# EAGLE board 001 (EAGLE 9.6.2)
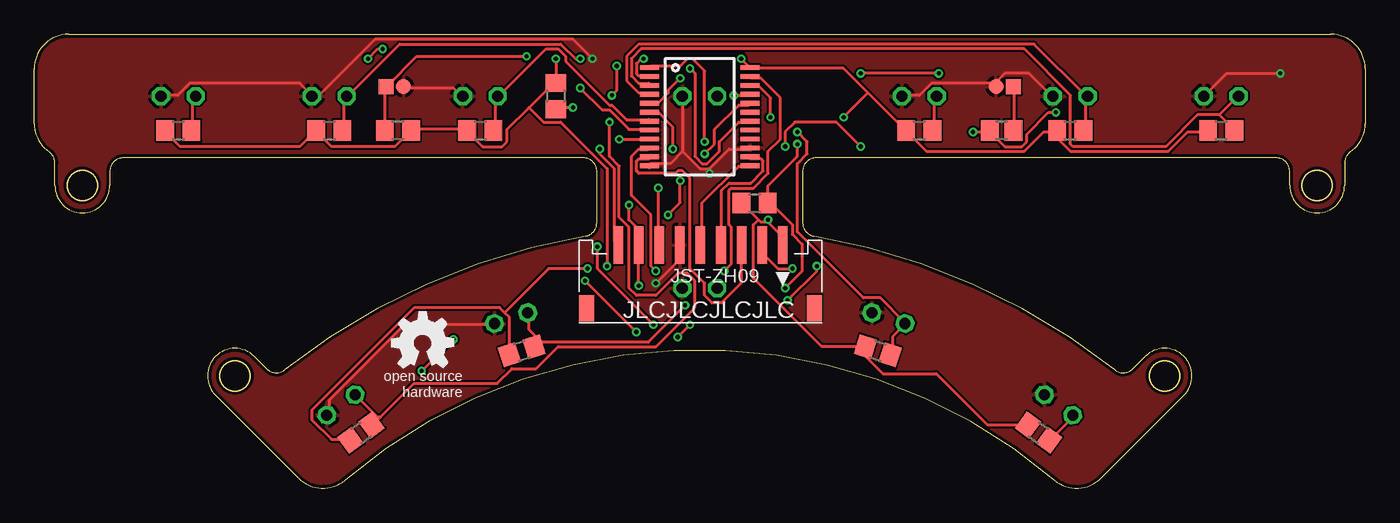
[diagram p0: board, top side]
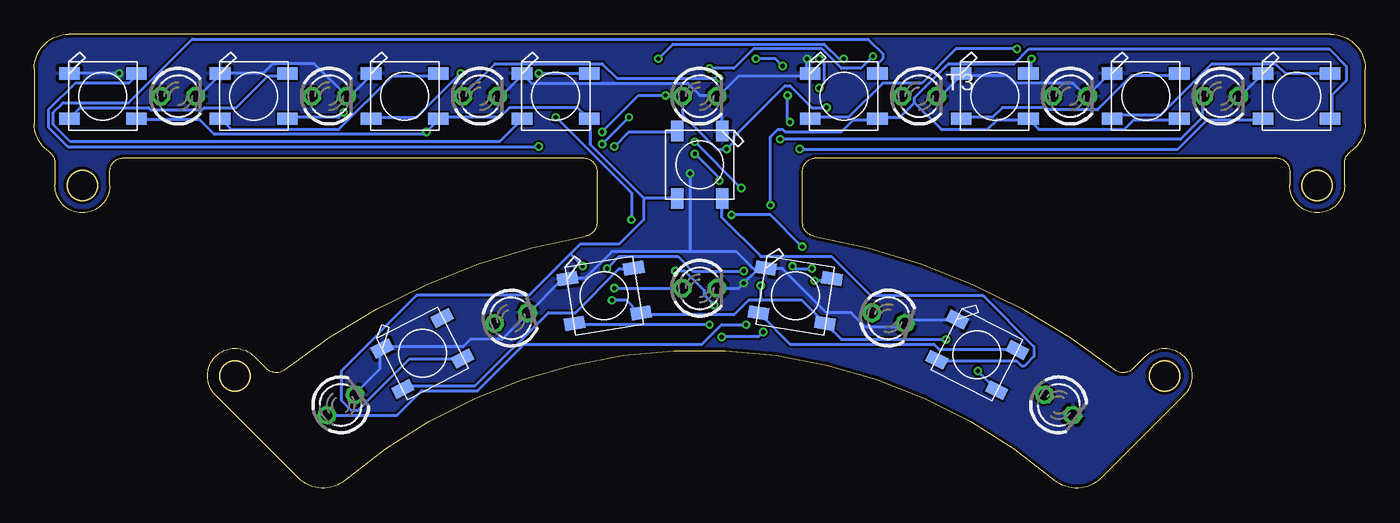
[diagram p1: board, bottom side, seen from below]

Size 97 x 33.07 mm. Coordinates in mm from the lower left corner, seen from the top.
Outline: 0,26.57 0,30.57 arc-90 2.5,33.07 94.5,33.07 arc-90 97,30.57 97,26.57 arc-55 95.93,24.52 arc55 95.5,23.7 95.5,22.07 arc-180 91.5,22.07 91.5,23.07 arc90 90.5,24.07 57,24.07 arc90 56,23.07 56,19.35 arc80 56.83,18.36 arc-28 78.74,8.63 arc83 80.06,8.71 80.97,9.61 arc-180 83.79,6.78 77.74,0.73 arc-85 74.36,0.59 arc81 22.64,0.59 arc-85 19.26,0.73 13.21,6.78 arc-180 16.03,9.61 16.94,8.71 arc83 18.26,8.63 arc-28 40.17,18.36 arc80 41,19.35 41,23.07 arc90 40,24.07 6.5,24.07 arc90 5.5,23.07 5.5,22.07 arc-180 1.5,22.07 1.5,23.7 arc55 1.07,24.52 arc-55 0,26.57
Outline: circle at 14.62,8.19 radius 1.1
Outline: circle at 82.38,8.19 radius 1.1
Outline: circle at 93.5,22.07 radius 1.1
Outline: circle at 3.5,22.07 radius 1.1
Copper layers (1*16): Top 0.035mm / dielectric 1.5mm / Bottom 0.035mm
Design rules "SeeedStudio_2layer_DRU_no_angle_20140221": minimum track width 6mil, minimum drill 12mil, track to track 6mil, track to pad 6mil, pad to pad 6mil, via to via 6mil, smd to smd 0mil, copper to edge 10mil, drill to drill 10mil, minimum pad ring 10mil, minimum via ring 6mil, stop-mask expansion 2mil, vias tented up to drill 100mil, thermal gap 10mil
Net classes: 0 default: width 0.203 mm

## Footprints (pad centres in the part's own frame; a part is rotated, then mirrored left to right if it is on the bottom)
WS2812B = smd 1.5 x 0.9: 1-VDD 2.45,-1.65; 2-DOUT 2.45,1.65; 3-GND -2.45,1.65; 4-DIN -2.45,-1.65
ZH-SM4-SIDE09 = smd 0.7 x 2.7: 1 -14.85,-5.65; 2 -13.35,-5.65; 3 -11.85,-5.65; 4 -10.35,-5.65; 5 -8.85,-5.65; 6 -7.35,-5.65; 7 -5.85,-5.65; 8 -4.35,-5.65; 9 -2.85,-5.65 | smd 1.1 x 1.9: P$1 -0.55,-1.05; P$2 -17.15,-1.05
R2012 = smd 1.3 x 1.5: 1 -0.85,0; 2 0.85,0
R0805 = smd 1.3 x 1.5: 1 -0.95,0; 2 0.95,0
MYPARTS_NJL7502L = drill 0.813 octagon: C -1.27,0; E 1.27,0
TP11R = smd 1.1 x 1.1: TP 0,0
TP11SQ = smd 1.1 x 1.1: TP 0,0
SPARKFUN_SSOP24 = smd 0.348 x 1.397: 1 -3.575,-3.656; 2 -2.925,-3.656; 3 -2.275,-3.656; 4 -1.625,-3.656; 5 -0.975,-3.656; 6 -0.325,-3.656; 7 0.325,-3.656; 8 0.975,-3.656; 9 1.625,-3.656; 10 2.275,-3.656; 11 2.925,-3.656; 12 3.575,-3.656; 13 3.575,3.656; 14 2.925,3.656; 15 2.275,3.656; 16 1.625,3.656; 17 0.975,3.656; 18 0.325,3.656; 19 -0.325,3.656; 20 -0.975,3.656; 21 -1.625,3.656; 22 -2.275,3.656; 23 -2.925,3.656; 24 -3.575,3.656

## Placement (x,y rotation side)
LED1  WS2812B5050  [WS2812B]  5,28.57 0 bottom
LED2  WS2812B5050  [WS2812B]  16,28.57 0 bottom
LED3  WS2812B5050  [WS2812B]  27,28.57 0 bottom
LED4  WS2812B5050  [WS2812B]  38,28.57 0 bottom
LED5  WS2812B5050  [WS2812B]  59,28.57 0 bottom
LED6  WS2812B5050  [WS2812B]  70,28.57 0 bottom
LED7  WS2812B5050  [WS2812B]  81,28.57 0 bottom
LED8  WS2812B5050  [WS2812B]  92,28.57 0 bottom
LED9  WS2812B5050  [WS2812B]  48.5,23.57 270 bottom
LED10  WS2812B5050  [WS2812B]  28.3,9.72 333 bottom
LED11  WS2812B5050  [WS2812B]  41.54,14.03 351 bottom
LED12  WS2812B5050  [WS2812B]  55.46,14.03 9 bottom
LED13  WS2812B5050  [WS2812B]  68.7,9.82 27 bottom
P1  [ZH-SM4-SIDE09]  39.7,12.07 180 top
R1  180  [R2012]  70.5,26.07 180 top
R3  120k  [R0805]  26.5,26.07 180 top
R5  120k  [R0805]  10.5,26.07 0 top
R6  120k  [R0805]  21.5,26.07 0 top
R7  120k  [R0805]  32.5,26.07 0 top
R8  120k  [R0805]  38,28.57 270 top
R9  120k  [R0805]  64.5,26.07 0 top
R10  120k  [R0805]  75.5,26.07 0 top
R11  120k  [R0805]  86.5,26.07 0 top
R12  120k  [R0805]  23.81,4.05 36 top
R13  120k  [R0805]  35.52,10.02 18 top
R14  120k  [R0805]  52.5,20.77 0 top
R15  120k  [R0805]  61.48,10.02 342 top
R16  120k  [R0805]  73.19,4.05 324 top
T1  NJL7502L  [MYPARTS_NJL7502L]  10.5,28.57 0 bottom
T2  NJL7502L  [MYPARTS_NJL7502L]  21.5,28.57 0 bottom
T3  NJL7502L  [MYPARTS_NJL7502L]  32.5,28.57 0 bottom
T4  NJL7502L  [MYPARTS_NJL7502L]  48.5,28.57 0 bottom
T5  NJL7502L  [MYPARTS_NJL7502L]  64.5,28.57 0 bottom
T6  NJL7502L  [MYPARTS_NJL7502L]  75.5,28.57 0 bottom
T7  NJL7502L  [MYPARTS_NJL7502L]  86.5,28.57 0 bottom
T8  NJL7502L  [MYPARTS_NJL7502L]  22.34,6.07 324 bottom
T9  NJL7502L  [MYPARTS_NJL7502L]  34.75,12.4 342 bottom
T10  NJL7502L  [MYPARTS_NJL7502L]  48.5,14.57 0 bottom
T11  NJL7502L  [MYPARTS_NJL7502L]  62.25,12.4 18 bottom
T12  NJL7502L  [MYPARTS_NJL7502L]  74.66,6.07 36 bottom
TP1  TPSQTP11R  [TP11R]  70.09,29.26 0 top
TP2  TPSQTP11SQ  [TP11SQ]  71.36,29.26 0 top
TP3  TPSQTP11R  [TP11R]  26.91,29.26 0 top
TP4  TPSQTP11SQ  [TP11SQ]  25.64,29.26 0 top
U$1  74HC4067  [SPARKFUN_SSOP24]  48.5,27.07 270 top
U$2  [OSHW_5MM]  28.3,10.57 0 top

## Library data of the parts
LED1-LED13 = microbuilder
P1 = zh
R1 R3 R5-R16 = rcl; SPICEPREFIX: R
T1-T12 = #001-line
TP1-TP4 = testpad
U$1 = Analog-Digital-Mux-Breakout
U$2 = oshw

## Nets
+3V3: P1.1 R3.1 R5.1 R6.1 R7.1 R8.1 R9.1 R10.1 R11.1 R12.1 R13.1 R14.1 R15.1 R16.1 U$1.24
+5V: LED1.1-VDD LED2.1-VDD LED3.1-VDD LED4.1-VDD LED5.1-VDD LED6.1-VDD LED7.1-VDD LED8.1-VDD LED9.1-VDD LED10.1-VDD LED11.1-VDD LED12.1-VDD LED13.1-VDD P1.8 R1.2
GND: LED1.3-GND LED2.3-GND LED3.3-GND LED4.3-GND LED5.3-GND LED6.3-GND LED7.3-GND LED8.3-GND LED9.3-GND LED10.3-GND LED11.3-GND LED12.3-GND LED13.3-GND P1.6 T1.E T2.E T3.E T4.E T5.E T6.E T7.E T8.E T9.E T10.E T11.E T12.E TP1.TP TP3.TP U$1.12 U$1.15
IN0: R5.2 T1.C U$1.9
IN1: R6.2 T2.C U$1.8
IN2: R7.2 T3.C U$1.7
IN3: R8.2 T4.C U$1.6
IN4: R9.2 T5.C U$1.5
IN5: R10.2 T6.C U$1.4
IN6: R11.2 T7.C U$1.3
IN7: R12.2 T8.C U$1.2
IN8: R13.2 T9.C U$1.23
IN9: R14.2 T10.C U$1.22
IN10: R15.2 T11.C U$1.21
IN11: R16.2 T12.C U$1.20
IN12: U$1.19
IN13: R3.2 TP4.TP U$1.18
IN14: U$1.17
IN15: U$1.16
MUX: P1.7 U$1.1
N$1: LED2.2-DOUT LED3.4-DIN
N$2: LED1.2-DOUT LED2.4-DIN
N$3: LED3.2-DOUT LED4.4-DIN
N$4: LED4.2-DOUT LED5.4-DIN
N$5: LED5.2-DOUT LED6.4-DIN
N$6: LED6.2-DOUT LED7.4-DIN
N$7: LED7.2-DOUT LED8.4-DIN
N$8: LED8.2-DOUT LED9.4-DIN
N$9: LED9.2-DOUT LED10.4-DIN
N$10: LED10.2-DOUT LED11.4-DIN
N$11: LED11.2-DOUT LED12.4-DIN
N$12: R1.1 TP2.TP
N$13: LED12.2-DOUT LED13.4-DIN
NEOPIXEL-SIGNAL: LED1.4-DIN P1.9
S0: P1.2 U$1.10
S1: P1.3 U$1.11
S2: P1.4 U$1.14
S3: P1.5 U$1.13

## Tracks (layer width: path | path; a pad name or v marks a point on that pad's centre or on a via)
+3V3  (via drill 0.3)
  Top 0.203: 34.28,12.8 34.63,12.45 34.63,9.78 R13.1 | 34.28,12.8 33.92,13.16 27.7,13.16 20.23,5.69 20.23,4.98 21.65,3.56 22.9,3.56 R12.1 | R5.1 9.56,25.96 10.63,24.89 19.34,24.89 20.41,25.96 R6.1 20.59,25.96 21.65,24.89 26.27,24.89 27.34,25.96 R3.1 27.52,26.14 31.43,26.14 R7.1 31.61,25.96 32.68,24.89 34.1,24.89 34.45,25.25 34.45,26.14 36.05,27.74 | 36.05,27.74 37.83,29.52 R8.1 38.01,29.7 v38.01,31.3 | 34.28,12.8 37.48,16 v40.32,16 | v41.74,16.18 41.74,23.29 38.37,26.67 37.12,26.67 36.05,27.74 | 52.77,19.56 52.95,19.38 53.48,19.38 | 52.77,19.56 51.7,20.63 R14.1 | 53.48,19.38 54.55,18.32 54.55,17.78 P1.1 | R16.1 72.33,4.63 69.48,4.63 65.75,8.36 61.84,8.36 60.59,9.6 60.59,10.14 R15.1 60.41,10.32 57.39,10.32 52.41,15.29 52.41,19.21 52.77,19.56 | 60.77,28.81 63.44,26.14 R9.1 63.61,25.96 65.03,24.54 72.15,24.54 73.57,25.96 74.46,25.96 R10.1 74.64,25.96 74.64,25.43 75.53,24.54 82.64,24.54 84.06,25.96 85.48,25.96 R11.1 | 60.77,28.81 58.99,30.58 52.23,30.58 U$1.24 52.06,30.76 v51.52,31.3 | v53.48,19.56 53.48,19.38 | 60.77,28.81 v58.99,27.03
  Bottom 0.203: v40.32,16 41.57,16 v41.74,16.18 | v53.48,19.56 53.48,21.52 v58.99,27.03 | v38.01,31.3 38.37,31.3 39.43,32.36 50.46,32.36 v51.52,31.3
+5V  (via drill 0.3)
  Top 0.203: v68.41,25.96 69.48,25.96 R1.2 69.66,25.96 70.72,24.89 71.97,24.89 72.33,25.25 72.33,25.78 73.92,27.38 v74.46,27.38 | v30.54,10.85 v28.23,8.54 | v44.05,14.76 44.05,17.6 P1.8 43.88,17.78 43.88,19.03 43.34,19.56 v43.34,20.63 | v57.03,16.18 57.03,15.83 v54.9,13.69
  Bottom 0.203: 52.59,21.16 50.28,21.16 LED9.1-VDD | 52.59,21.16 56.5,25.07 56.5,26.85 LED5.1-VDD 56.68,27.03 57.39,27.74 62.37,27.74 63.08,27.03 67.53,27.03 LED6.1-VDD 67.53,26.85 v68.41,25.96 68.59,25.78 83.88,25.78 84.95,26.85 89.39,26.85 LED8.1-VDD | 57.92,17.07 57.21,17.78 54.37,17.78 52.59,19.56 52.59,21.16 | 57.92,17.07 60.95,14.05 69.12,14.05 74.64,8.54 74.64,6.4 73.92,5.69 73.39,5.69 69.66,9.43 65.92,9.43 LED13.1-VDD | v74.46,27.38 74.81,27.03 78.55,27.03 LED7.1-VDD | LED2.1-VDD 13.65,26.85 16.85,26.85 17.56,26.14 23.79,26.14 24.5,26.85 LED3.1-VDD 24.68,26.85 26.81,26.85 27.52,26.14 30.9,26.14 32.85,28.1 | 32.85,28.1 32.85,28.45 30.36,30.94 25.56,30.94 24.5,32.01 2.63,32.01 1.38,30.76 1.38,29.7 2.45,28.63 2.45,27.03 LED1.1-VDD | 32.85,28.1 33.92,27.03 35.52,27.03 LED4.1-VDD 35.7,26.85 37.3,26.85 38.19,25.96 42.28,25.96 42.45,26.14 42.81,26.14 43.34,25.61 v43.34,20.63 | v28.23,8.54 26.99,7.29 LED10.1-VDD | v30.54,10.85 38.19,10.85 39.25,11.92 LED11.1-VDD 39.43,12.09 41.03,13.69 44.05,13.69 | 44.05,13.69 44.94,13.69 46.01,12.63 52.77,12.63 LED12.1-VDD 52.95,12.8 53.83,13.69 v54.9,13.69 | 44.05,13.69 v44.05,14.76 | v57.03,16.18 57.92,17.07
GND  (via drill 0.3)
  Top 0.203: v45.3,14.94 46.9,16.54 46.9,17.6 P1.6 | T8.E 21.47,5.34 21.47,6.4 26.99,11.92 33.39,11.92 T9.E | TP3.TP 26.99,29.16 30.54,29.16 31.08,28.63 T3.E | T1.E 9.38,28.63 10.45,28.63 11.34,29.52 19.34,29.52 20.23,28.63 T2.E 20.41,28.63 20.76,28.63 24.85,32.72 39.25,32.72 v40.68,31.3 | 47.26,24.54 46.37,23.65 44.94,23.65 U$1.12 | 47.26,24.54 47.26,28.45 T4.E | 49.21,23.29 50.63,24.72 52.06,24.72 U$1.15 | 49.21,23.29 48.5,23.29 47.26,24.54 | v90.82,30.23 86.91,30.23 85.31,28.63 T7.E | 70.19,29.52 70.19,29.7 70.72,30.23 72.5,30.23 74.1,28.63 T6.E | 70.19,29.52 70.19,29.34 TP1.TP 70.19,29.52 | 70.19,29.52 65.39,29.52 64.5,28.63 63.26,28.63 T5.E | 49.21,23.29 v49.21,22.94
  Bottom 0.203: T12.E 73.57,6.94 71.79,8.71 71.79,10.14 LED13.3-GND 71.61,10.32 65.75,10.32 65.21,10.85 62.9,10.85 61.12,12.63 T11.E 60.95,12.8 58.63,15.12 58.28,15.12 LED12.3-GND 58.1,15.29 56.86,15.29 54.9,17.25 49.21,17.25 | 44.41,15.83 v45.3,14.94 45.66,14.58 47.08,14.58 T10.E | 44.41,15.83 44.23,16 43.88,16 LED11.3-GND | LED10.3-GND 29.83,12.27 33.21,12.27 33.39,12.09 T9.E 33.56,11.92 33.74,11.74 36.41,11.74 37.48,12.8 39.25,12.8 42.45,16 43.7,16 LED11.3-GND | 49.21,17.25 45.83,17.25 44.41,15.83 | 44.41,15.83 LED11.3-GND | T3.E 31.08,28.45 29.48,30.05 LED3.3-GND 29.3,30.05 26.1,30.05 25.56,29.52 21.3,29.52 20.41,28.63 T2.E 20.23,28.63 18.81,30.05 18.45,30.05 LED2.3-GND | LED1.3-GND 7.61,30.05 9.21,28.45 T1.E | LED9.3-GND 46.9,26.14 46.9,28.27 47.08,28.45 T4.E | 40.68,30.05 45.66,30.05 47.08,28.63 T4.E | 40.68,30.05 40.5,30.05 LED4.3-GND 40.68,30.05 | T7.E 85.13,28.45 83.53,30.05 LED7.3-GND 83.35,30.23 80.33,30.23 79.61,30.94 76.59,30.94 74.28,28.63 T6.E 74.1,28.45 72.5,30.05 LED6.3-GND | v90.82,30.23 94.37,30.23 LED8.3-GND | T5.E 63.08,28.45 61.48,30.05 LED5.3-GND 61.3,30.05 60.77,29.52 49.39,29.52 48.5,28.63 47.26,28.63 T4.E | 40.68,30.05 v40.68,31.3 | v49.21,22.94 49.21,17.25
  pour Top: 0.5,34.07 97.5,34.07 97.5,-3.93 -0.5,-3.93 -0.5,34.07
  pour Bottom: -0.5,34.07 -0.5,-3.93 97.5,-3.93 97.5,34.07
IN0  (via drill 0.3)
  Top 0.203: v42.63,25.43 44.77,25.43 U$1.9 | R5.2 11.52,26.14 11.52,28.27 11.7,28.45 T1.C
  Bottom 0.203: v42.63,25.43 13.47,25.43 11.87,27.03 11.87,28.45 T1.C
IN1  (via drill 0.3)
  Top 0.203: v39.79,29.16 41.39,27.56 41.92,27.56 43.34,26.14 44.77,26.14 U$1.8 | v39.79,31.3 39.43,31.3 38.37,32.36 26.63,32.36 22.9,28.63 T2.C 22.72,28.45 22.54,28.27 22.54,26.14 R6.2
  Bottom 0.203: v39.79,29.16 39.43,29.52 39.43,30.94 v39.79,31.3
IN2
  Top 0.203: U$1.7 44.77,26.85 43.17,26.85 42.1,27.92 41.92,27.92 38.72,31.12 38.72,31.47 38.19,32.01 37.3,32.01 33.92,28.63 T3.C 33.74,28.45 33.56,28.27 33.56,26.14 R7.2
IN3  (via drill 0.3)
  Top 0.203: v46.54,24.72 46.54,26.32 45.48,27.38 44.94,27.38 U$1.6 | v39.25,27.74 38.01,27.74 R8.2
  Bottom 0.203: T4.C 49.74,28.45 49.74,27.21 47.26,24.72 v46.54,24.72 46.01,25.25 46.01,25.61 42.28,29.34 41.92,29.34 40.32,27.74 v39.25,27.74
IN4  (via drill 0.3)
  Top 0.203: v47.08,29.87 46.19,28.98 46.19,28.81 45.48,28.1 44.94,28.1 U$1.5 | R9.2 65.57,26.14 65.57,28.27 65.75,28.45 T5.C
  Bottom 0.203: v47.08,29.87 54.55,29.87 55.61,30.94 63.44,30.94 65.75,28.63 T5.C
IN5
  Top 0.203: U$1.4 44.77,28.81 44.05,28.81 43.17,29.7 43.17,31.47 44.05,32.36 72.86,32.36 76.59,28.63 T6.C 76.59,28.45 76.59,26.14 R10.2
IN6
  Top 0.203: 86.37,27.21 84.77,27.21 82.46,24.89 75.7,24.89 75.53,25.07 75.53,28.63 72.15,32.01 44.23,32.01 43.52,31.3 43.52,30.05 44.05,29.52 44.77,29.52 U$1.3 | 86.37,27.21 87.44,26.14 R11.2 | 86.37,27.21 87.62,28.45 T7.C
IN7  (via drill 0.3)
  Top 0.203: v44.41,31.3 44.23,31.3 43.88,30.94 43.88,30.23 44.05,30.05 44.77,30.05 U$1.2 | v42.45,30.76 42.45,28.98 v42.1,28.63 | v41.92,26.67 41.92,24.18 42.63,23.47 42.63,19.74 43.34,19.03 43.34,14.58 43.88,14.05 45.3,14.05 46.9,15.65 47.61,15.65 48.14,15.12 48.14,13.16 45.3,10.32 38.19,10.32 36.59,8.71 34.81,8.71 33.74,7.65 27.7,7.65 25.21,5.16 | 25.21,5.16 24.68,4.63 R12.2 | 25.21,5.16 25.03,5.16 23.43,6.76 T8.C
  Bottom 0.203: v44.41,31.3 42.99,31.3 v42.45,30.76 | v42.1,28.63 42.1,26.85 v41.92,26.67
IN8  (via drill 0.3)
  Top 0.203: v50.28,15.83 50.81,16.36 50.81,19.03 50.63,19.21 50.63,21.69 50.81,21.87 52.41,21.87 53.48,22.94 53.48,24.54 54.37,25.43 54.37,28.45 52.95,29.87 52.23,29.87 U$1.23 | v47.43,13.34 44.77,10.67 36.94,10.67 | 36.94,10.67 36.59,10.32 R13.2 36.94,10.67 | 36.94,10.67 36.05,11.56 36.05,12.63 T9.C
  Bottom 0.203: v50.28,15.83 49.57,15.83 48.14,14.4 48.14,14.05 v47.43,13.34
IN9  (via drill 0.3)
  Top 0.203: v53.66,27.03 53.66,28.45 52.77,29.34 52.23,29.34 U$1.22 | v55.61,25.07 55.61,24.18 53.48,22.05 53.48,20.98 | 53.48,20.98 53.48,20.81 R14.2 53.48,20.98 | v54.72,14.58 55.97,15.83 55.97,17.78 55.26,18.49 55.26,19.21 53.48,20.98
  Bottom 0.203: v55.61,25.07 v53.66,27.03 | v54.72,14.58 49.92,14.58 T10.C
IN10  (via drill 0.3)
  Top 0.203: v50.99,28.63 52.06,28.63 U$1.21 | v55.61,25.96 56.32,25.25 56.32,24.36 55.61,23.65 55.61,18.67 60.41,13.87 61.66,13.87 63.44,12.09 T11.C 63.44,11.92 62.55,11.03 62.55,9.78 R15.2
  Bottom 0.203: v50.99,28.63 52.95,28.63 v55.61,25.96
IN11  (via drill 0.3)
  Top 0.203: v48.86,24.36 49.57,25.07 49.57,26.14 51.34,27.92 52.06,27.92 U$1.20 | v47.08,22.41 47.08,20.81 v46.19,19.92 | v41.03,17.6 41.03,16 v45.12,11.92 | R16.2 74.1,3.56 75.7,5.16 T12.C
  Bottom 0.203: v48.86,24.36 47.08,22.58 v47.08,22.41 | v46.19,19.92 43.34,19.92 v41.03,17.6 | v45.12,11.92 46.9,11.92 48.32,10.49 61.3,10.49 64.68,7.11 68.77,7.11 70.55,5.34 75.53,5.34 T12.C
IN13  (via drill 0.3)
  Top 0.203: R3.2 25.56,26.14 25.56,29.16 TP4.TP 25.74,29.34 27.88,31.47 v35.88,31.47 | v47.79,30.58 48.14,30.23 48.14,24.18 48.68,23.65 49.03,23.65 49.92,24.54 49.92,25.25 51.34,26.67 52.06,26.67 U$1.18
  Bottom 0.203: v47.79,30.58 46.01,30.58 44.59,32.01 39.61,32.01 38.19,30.58 36.77,30.58 v35.88,31.47
MUX  (via drill 0.3)
  Top 0.203: v48.86,25.25 48.86,30.41 47.97,31.3 47.61,31.3 47.08,30.76 44.94,30.76 U$1.1 | v45.48,21.87 45.48,17.78 P1.7
  Bottom 0.203: v45.48,21.87 v48.86,25.25
N$1
  Bottom 0.203: LED3.4-DIN 29.3,27.03 27.16,27.03 26.45,27.74 23.25,27.74 23.07,27.56 19.52,27.56 17.03,30.05 13.65,30.05 LED2.2-DOUT
N$2
  Bottom 0.203: LED1.2-DOUT 2.63,30.23 5.83,30.23 6.54,30.94 11.16,30.94 14.9,27.21 18.1,27.21 18.27,27.03 LED2.4-DIN
N$3  (via drill 0.3)
  Top 0.203: v25.39,32.01 25.03,32.01 v24.32,31.3
  Bottom 0.203: v25.39,32.01 29.83,32.01 32.32,29.52 35.16,29.52 37.65,27.03 40.32,27.03 LED4.4-DIN | v24.32,31.3 24.32,30.41 24.5,30.23 LED3.2-DOUT
N$4
  Bottom 0.203: LED4.2-DOUT 35.52,30.23 35.52,30.94 35.16,31.3 35.16,31.65 36.23,32.72 85.48,32.72 90.1,28.1 94.91,28.1 95.62,27.38 95.62,26.49 94.37,25.25 63.08,25.25 61.48,26.85 LED5.4-DIN
N$5  (via drill 0.3)
  Top 0.203: v65.92,30.23 v60.23,30.23
  Bottom 0.203: v60.23,30.23 56.68,30.23 LED5.2-DOUT | v65.92,30.23 69.12,27.03 72.33,27.03 LED6.4-DIN
N$6
  Bottom 0.203: LED6.2-DOUT 67.7,30.05 70.9,30.05 74.81,26.14 82.64,26.14 83.35,26.85 LED7.4-DIN
N$7
  Bottom 0.203: LED7.2-DOUT 78.73,30.05 79.97,30.05 82.28,27.74 84.59,27.74 84.77,27.56 88.5,27.56 88.68,27.74 93.66,27.74 94.37,27.03 LED8.4-DIN
N$8  (via drill 0.3)
  Top 0.203: v54.72,24.89 54.72,25.96 55.43,26.67 58.46,26.67 v60.23,24.89
  Bottom 0.203: v54.72,24.89 53.66,25.96 50.28,25.96 LED9.4-DIN | v60.23,24.89 94.55,24.89 95.97,26.32 95.97,27.56 94.02,29.52 90.1,29.52 89.57,30.05 LED8.2-DOUT
N$9
  Bottom 0.203: LED10.4-DIN 31.08,9.25 25.39,9.25 25.03,8.89 24.85,8.89 24.14,9.6 24.14,10.32 27.88,14.05 36.05,14.05 38.9,16.89 44.05,16.89 46.9,19.74 46.9,20.98 LED9.2-DOUT
N$10
  Bottom 0.203: LED10.2-DOUT 25.39,10.14 31.08,10.14 31.43,10.49 41.92,10.49 44.05,12.63 LED11.4-DIN
N$11  (via drill 0.3)
  Top 0.203: v46.9,11.03 v47.79,11.92 | v40.14,15.12 v43.88,11.38
  Bottom 0.203: v47.79,11.92 57.57,11.92 LED12.4-DIN | v46.9,11.03 44.23,11.03 v43.88,11.38 | v40.14,15.12 38.9,15.12 LED11.2-DOUT
N$12
  Top 0.203: TP2.TP 71.44,29.16 71.44,26.14 R1.1
N$13
  Bottom 0.203: LED12.2-DOUT 53.3,16 54.37,16 57.57,12.8 59.52,12.8 64.86,7.47 69.84,7.47 70.01,7.29 LED13.4-DIN
NEOPIXEL-SIGNAL  (via drill 0.3)
  Top 0.203: v41.21,24.72 41.21,24.36 42.28,23.29 42.28,17.96 42.45,17.78 P1.9
  Bottom 0.203: v41.21,24.72 13.65,24.72 11.52,26.85 7.61,26.85 LED1.4-DIN
S0  (via drill 0.3)
  Top 0.203: v45.3,15.83 44.94,16.18 44.94,19.92 43.52,21.34 43.52,24.18 44.05,24.72 44.77,24.72 U$1.10 | v55.26,16 54.19,16 53.12,17.07 53.12,17.6 P1.2
  Bottom 0.203: v45.3,15.83 49.03,15.83 50.1,16.89 54.37,16.89 v55.26,16
S1
  Top 0.203: U$1.11 44.77,24.01 44.05,24.01 43.88,23.83 43.88,23.12 44.05,22.94 46.72,22.94 46.9,23.12 47.26,23.12 47.79,22.58 47.79,16 48.86,14.94 48.86,14.05 49.39,13.52 50.1,13.52 51.52,14.94 51.52,17.6 P1.3
S2
  Top 0.203: U$1.14 52.23,24.01 52.95,24.01 53.12,23.83 53.12,23.12 52.23,22.23 50.63,22.23 50.1,21.69 50.1,17.78 P1.4
S3
  Top 0.203: U$1.13 52.06,23.47 51.34,23.47 48.68,20.81 48.68,17.78 P1.5

## Text on the board
tPlace: JLCJLCJLCJLC